# EAGLE board Vent Schematic (EAGLE 8.4.2)

Size 160 x 100 mm. Coordinates in mm from the lower left corner, seen from the top.
Outline: 0,0 160,0 160,100 0,100 0,0
Copper layers (1*16): Top 0.035mm / dielectric 1.5mm / Bottom 0.035mm
Design rules "default": minimum track width 6mil, minimum drill 0.35mm, track to track 6mil, track to pad 6mil, pad to pad 6mil, via to via 6mil, smd to smd 6mil, copper to edge 40mil, drill to drill 6mil, minimum pad ring 10mil, minimum via ring 8mil, stop-mask expansion 4mil, vias tented up to drill 0mil, thermal gap 10mil

## Footprints (pad centres in the part's own frame; a part is rotated, then mirrored left to right if it is on the bottom)
EEU-FR1H101 = drill 1: G -1.75,0; P 1.75,0
DO41-10 = drill 1.118: A 5.08,0; C -5.08,0
2X10 = drill 1.016 pad 1.88 octagon: 1 -11.43,-1.27; 2 -11.43,1.27; 3 -8.89,-1.27; 4 -8.89,1.27; 5 -6.35,-1.27; 6 -6.35,1.27; 7 -3.81,-1.27; 8 -3.81,1.27; 9 -1.27,-1.27; 10 -1.27,1.27; 11 1.27,-1.27; 12 1.27,1.27; 13 3.81,-1.27; 14 3.81,1.27; 15 6.35,-1.27; 16 6.35,1.27; 17 8.89,-1.27; 18 8.89,1.27; 19 11.43,-1.27; 20 11.43,1.27
1X03_LOCK_LONGPADS = drill 1.016 long: 1 0,0; 2 2.54,-0.254; 3 5.08,0
SCREWTERMINAL-3.5MM-2 = drill 1.2 pad 2.032 square: 1 0,0 | drill 1.2 pad 2.032: 2 3.5,0
IND_2100LL_42_H = drill 1.321 pad 1.829 square: 1 -19.812,0 | drill 1.321 pad 1.829: 2 0,0
LED5MM = drill 0.813 octagon: A -1.27,0; K 1.27,0
0603-RES = smd 1.1 x 1: 1 -0.85,0; 2 0.85,0
PDIP-8_N = drill 0.889 pad 1.397 square: 1 -7.62,7.62 | drill 0.889 pad 1.397: 2 -7.62,5.08; 3 -7.62,2.54; 4 -7.62,0; 5 0,0; 6 0,2.54; 7 0,5.08; 8 0,7.62
TO-220 = drill 1.524 pad 2.032 square: 1 -5.105,-1.524 | drill 1.524 pad 2.032: 2 -2.54,-1.524; 3 0,-1.524

## Placement (x,y rotation side)
C1  100uF  [EEU-FR1H101]  -49.08,-148.43 0 top  (outside the outline)
C2  100uF  [EEU-FR1H101]  -49.08,-163.51 0 top  (outside the outline)
C3  100uF  [EEU-FR1H101]  -49.08,-178.59 0 top  (outside the outline)
D1  UF4003  [DO41-10]  -44.91,-216.76 0 top  (outside the outline)
JP1  [2X10]  -26.67,3.81 0 top  (outside the outline)
JP2  [2X10]  -26.67,11.43 0 top  (outside the outline)
JP3  [1X03_LOCK_LONGPADS]  -39.37,-15.24 0 top  (outside the outline)
JP4  [SCREWTERMINAL-3.5MM-2]  -46.99,-34.29 0 top  (outside the outline)
L1  27uH  [IND_2100LL_42_H]  -28.65,-129.77 0 top  (outside the outline)
L2  27uH  [IND_2100LL_42_H]  -28.65,-197.25 0 top  (outside the outline)
LED1  [LED5MM]  -49.53,-62.23 0 top  (outside the outline)
R1  160  [0603-RES]  -54.61,-53.34 0 top  (outside the outline)
R2  10k  [0603-RES]  -55.69,-93.04 0 top  (outside the outline)
R3  10k  [0603-RES]  -55.69,-95.4 0 top  (outside the outline)
U1  LT1300CN8PBF  [PDIP-8_N]  -43.76,-111.66 0 top  (outside the outline)
U2  STP10P6F6  [TO-220]  -41.83,-78.74 0 top  (outside the outline)

## Library data of the parts
C1-C3 = 100uF_Cap
D1 = diode
JP1-JP3 = SparkFun-Connectors
JP4 = SparkFun-Connectors; PROD_ID: CONN-08399
L1 L2 = Inductor-27uH; MANUFACTURER_PART_NUMBER: 2100LL270HRC; VENDOR: Bourns Electronics
LED1 = E-P-008-R1.2
R1-R3 = SparkFun-Passives
U1 = LT1300 BuckBoost; MANUFACTURER_PART_NUMBER: LT1300CN8#PBF; VENDOR: Linear Technology
U2 = PMOS_STP10P6F6; MANUFACTURER_PART_NUMBER: STP10P6F6; VENDOR: ST Microelectronics

## Nets
3V3: C2.P D1.C JP1.1 U1.4
3V_PWM: JP2.4 U2.1
6V_PWM: JP3.1 U2.3
GND: C1.G C2.G JP1.4 JP2.2 JP3.3 JP4.1 L2.1 LED1.K R3.1 U1.1 U1.2 U1.8
N$1: LED1.A R1.2
N$2: JP1.20 R1.1
N$3: JP1.3 R2.2 R3.2
N$4: C3.G D1.A L2.2
N$5: C3.P L1.1 U1.7
VIN: C1.P JP3.2 JP4.2 L1.2 R2.1 U1.6 U2.2

## Tracks (layer width: path | path; a pad name or v marks a point on that pad's centre or on a via)
3V3  (3 unrouted)
3V_PWM  (1 unrouted)
6V_PWM  (1 unrouted)
GND  (11 unrouted)
N$1  (1 unrouted)
N$2  (1 unrouted)
N$3  (2 unrouted)
N$4  (2 unrouted)
N$5  (2 unrouted)
VIN  (6 unrouted)